# Altium PCB arduino_nano_v3.PcbDoc
Units mm, origin at the board's own origin, x right, y up, seen from the top; angles counter-clockwise.
Board outline 21.72 x 42.16 mm, 4 copper layers (Top Layer, GND, Layer 2, Bottom Layer), stack 0.603 mm thick; 32 components, 43 nets, 165 pads, 43 vias.
Unrouted connection lines stored in the file: 2.
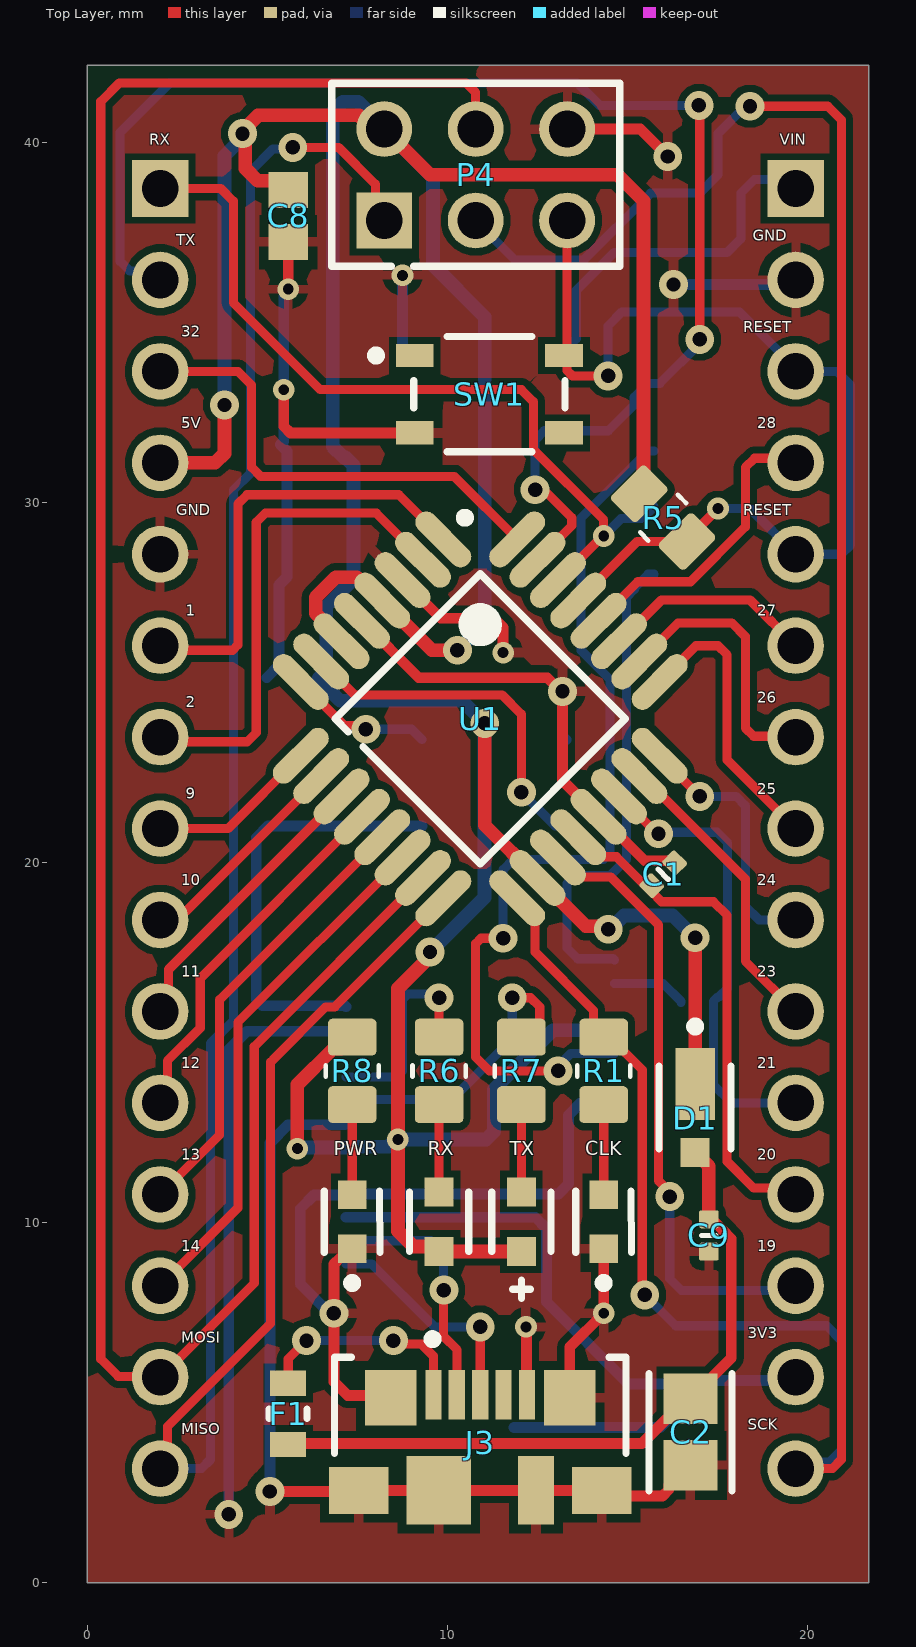
[diagram p0: Top Layer view]
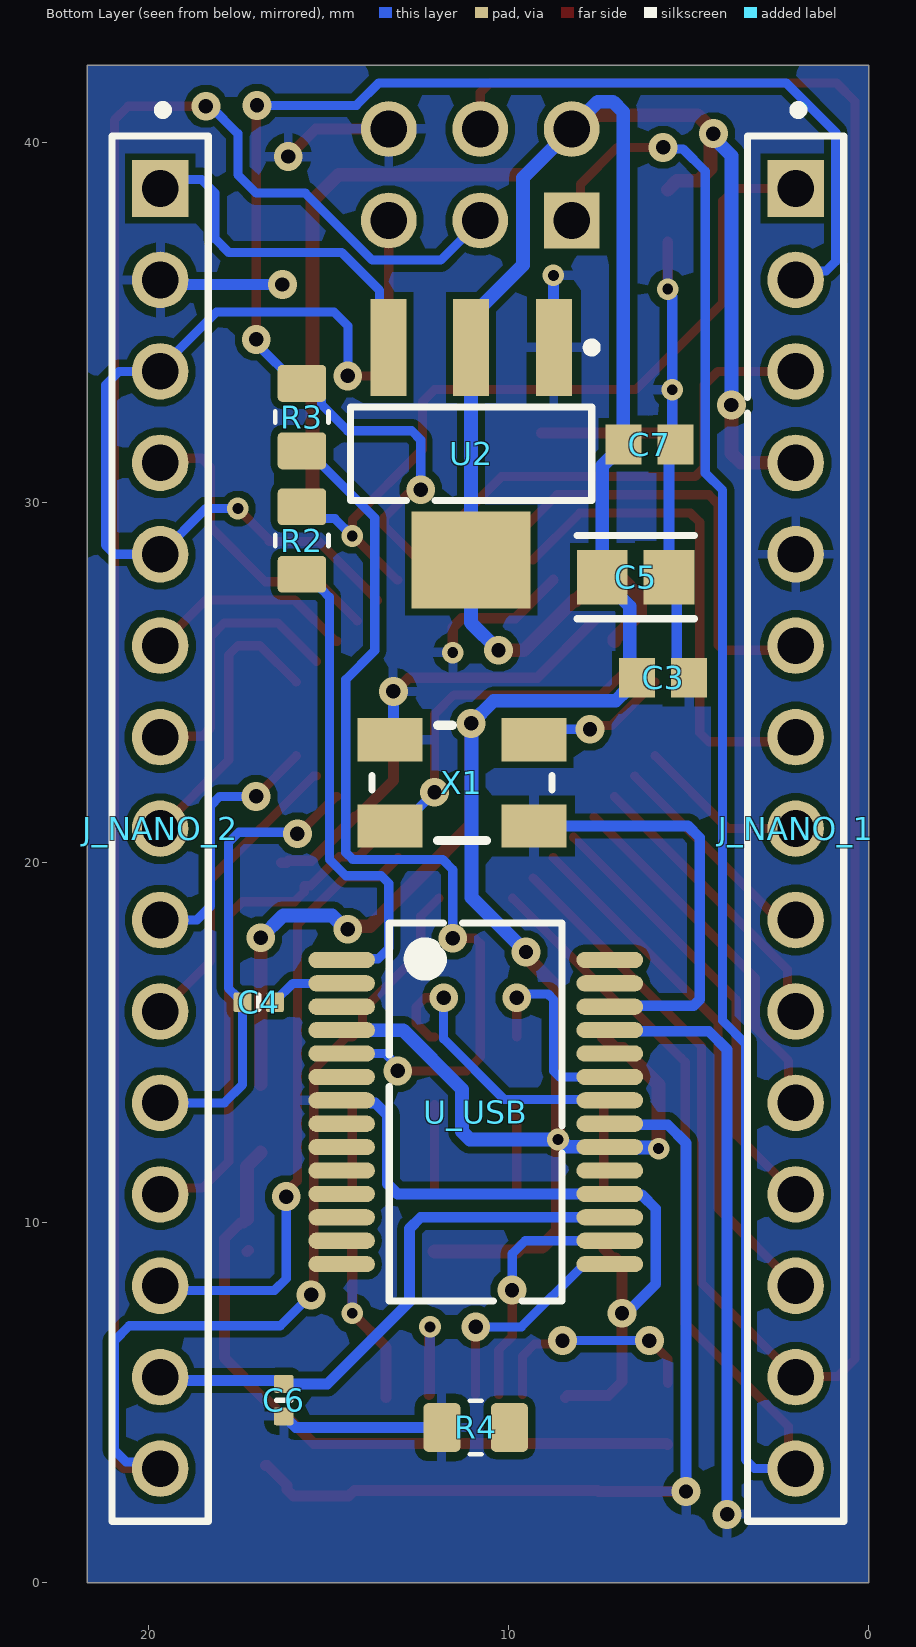
[diagram p1: Bottom Layer view, seen from below]
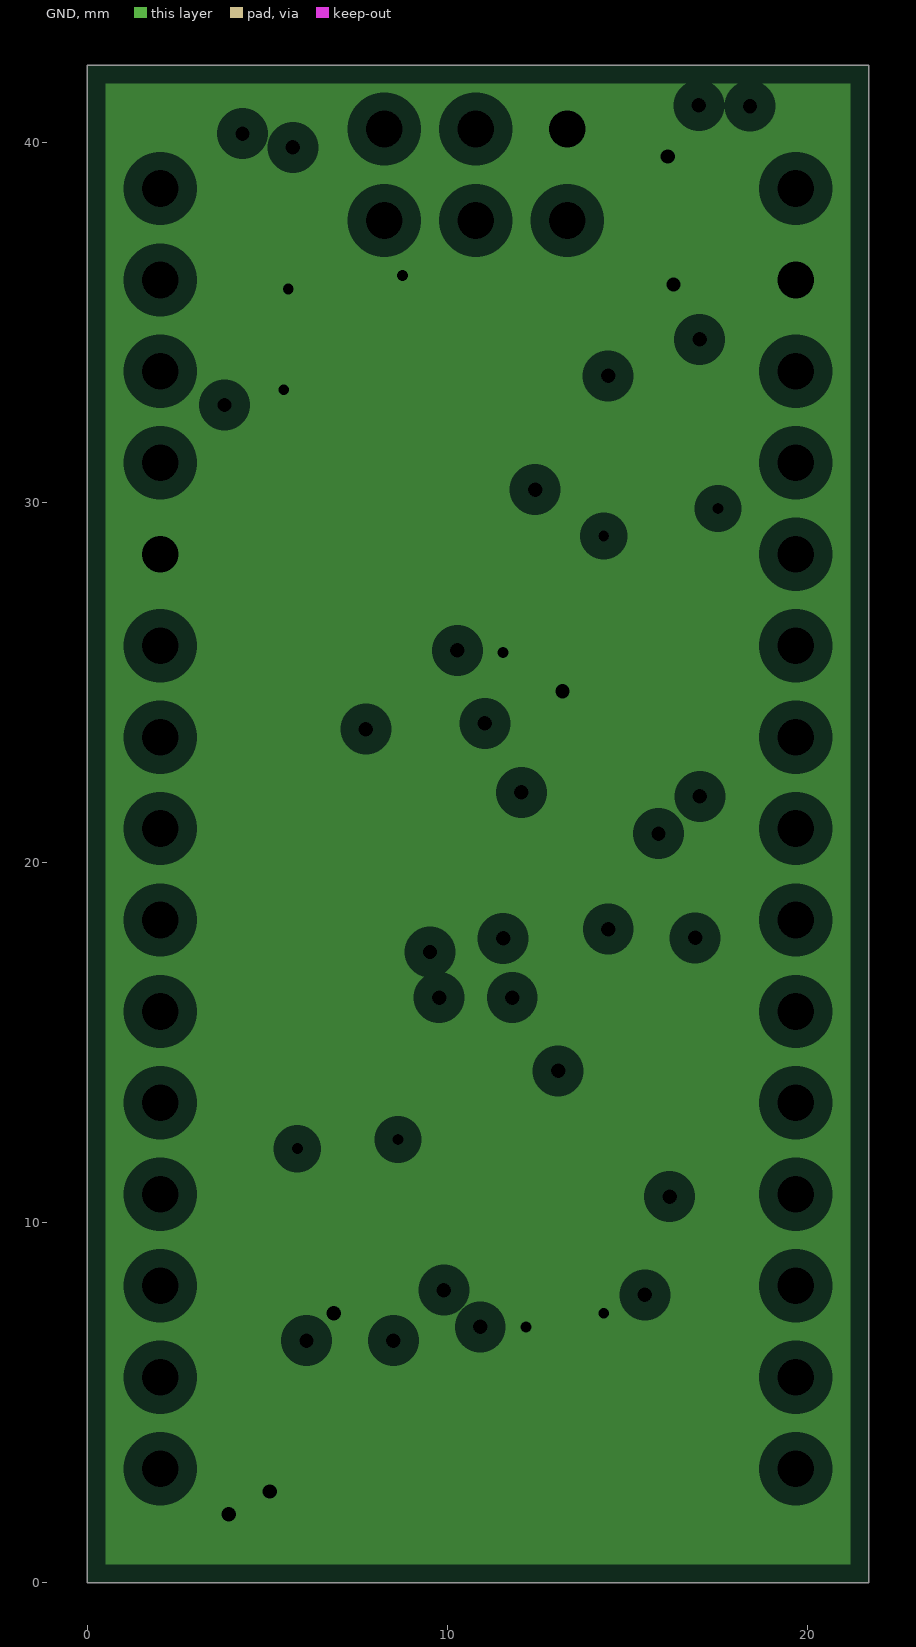
[diagram p2: GND, clearances drawn from the general rule]
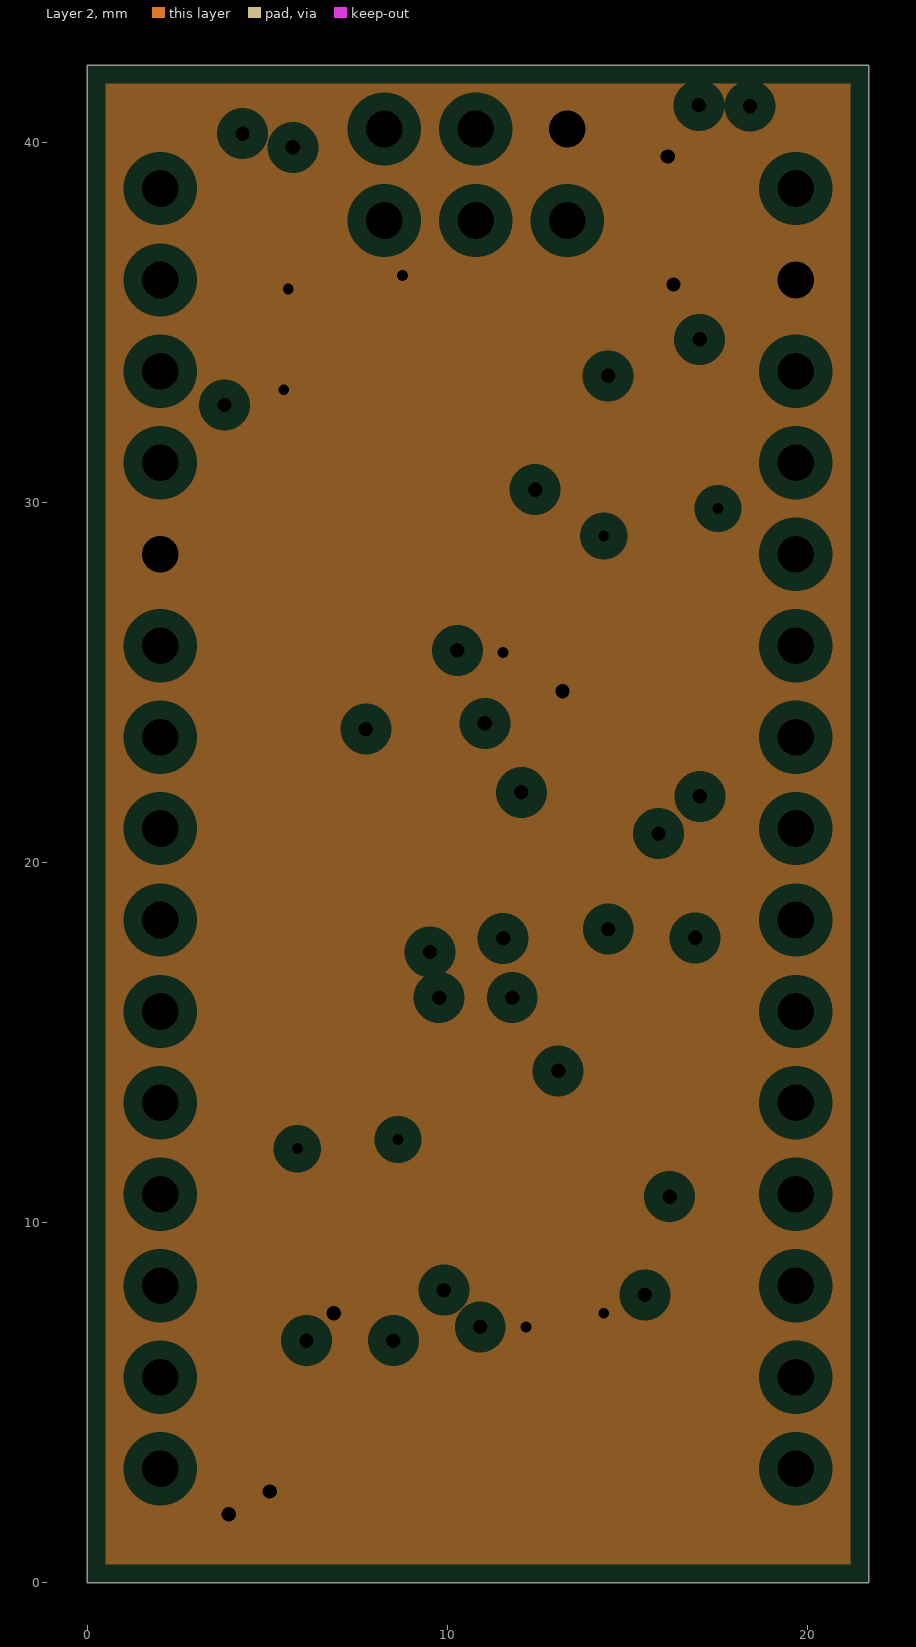
[diagram p3: Layer 2, clearances drawn from the general rule]
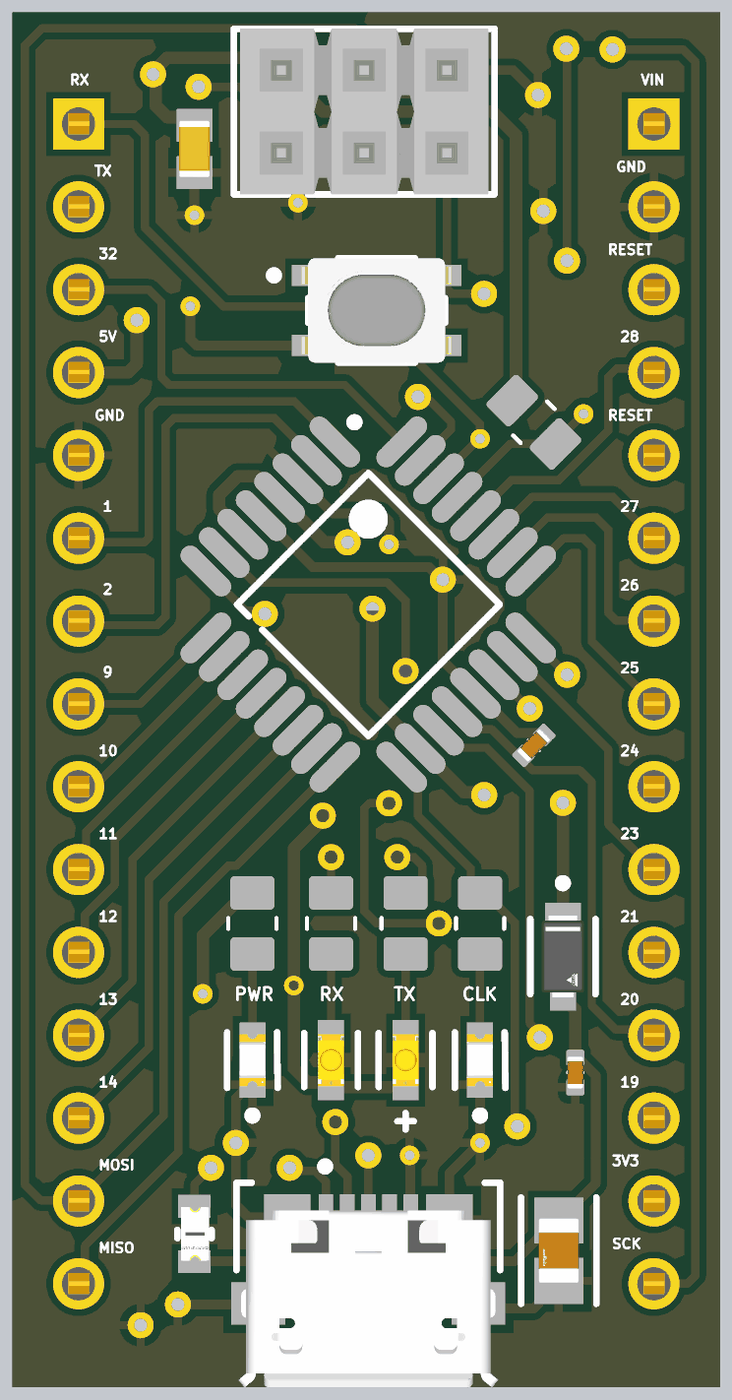
[diagram p4: 3D render of the assembled board from above, using the file's embedded part models]
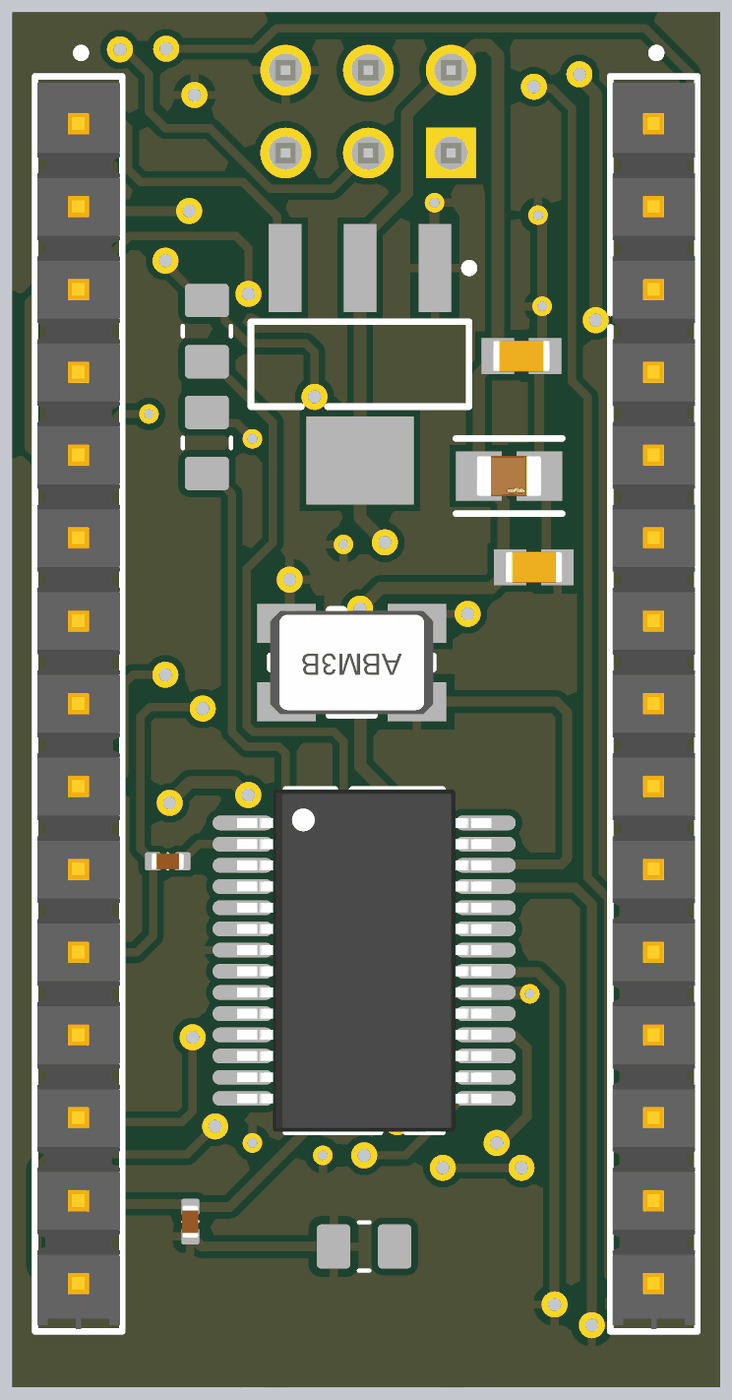
[diagram p5: 3D render of the assembled board from below, using the file's embedded part models]

## Layer stack, top to bottom
Top Solder: solder mask 0.0102, Solder Resist, Dk 3.5
Top Layer: signal copper 0.0356
Dielectric 2: prepreg 0.0711, PP-006, Dk 4.1
GND: plane copper 0.035, net GND
Dielectric 1: dielectric 0.32, FR-4, Dk 4.8
Layer 2: plane copper 0.035, net GND
Dielectric 3: prepreg 0.0711, PP-006, Dk 4.1
Bottom Layer: signal copper 0.0356
Bottom Solder: solder mask 0.0102, Solder Resist, Dk 3.5

## Board outline
0,0 0,42.164 21.717,42.164 21.717,0

## Design rules (kind name [scope] priority, off if disabled: settings)
AssemblyTestPointUsage [All] p1: isadvanced=TRUE
AssemblyTestpoint [All] p1: isadvanced=TRUE testpointundercomponent=TRUE minsize=1.016 maxsize=2.54 preferedsize=1.524 minholesize=0 maxholesize=1.016 preferedholesize=0.813 testpointgrid=0.025 usegrid=TRUE gridtolerance=0 allowsidetop=TRUE allowsidebottom=TRUE
Clearance Clearance_1 [OnMid vs OnMid] p1: gap=0.2 ignorepadtopadclearanceinfootprint=FALSE sourcerule=47 cellrowname=All cellrowtype=0 cellcolname=All cellcoltype=0 innerlayers=TRUE
Clearance Clearance_2 [(ExistsOnLayer('Top Layer') Or ExistsOnLayer('Bottom Layer')) vs (ExistsOnLayer('Top Layer') Or ExistsOnLayer('Bottom Layer'))] p2: gap=0.2 ignorepadtopadclearanceinfootprint=FALSE sourcerule=47 cellrowname=All cellrowtype=0 cellcolname=All cellcoltype=0 outerlayers=TRUE
Clearance [All] p3: gap=0.254 ignorepadtopadclearanceinfootprint=FALSE ismatrix=TRUE
ComponentClearance [All] p1: isadvanced=TRUE gap=0.254 collisioncheckmode=3 verticalgap=0.254 showdistances=FALSE
FabricationTestPointUsage [All] p1: isadvanced=TRUE valid=0 allowmultiple=FALSE
FabricationTestpoint [All] p1: isadvanced=TRUE side=3 testpointundercomponent=TRUE minsize=1.016 maxsize=2.54 preferedsize=1.524 minholesize=0 maxholesize=1.016 preferedholesize=0.813 testpointgrid=0.025 allowsidetop=TRUE allowsidebottom=TRUE usegrid=TRUE gridtolerance=0
FanoutControl Fanout_BGA [IsBGA] p1: isadvanced=TRUE bgadir=Out bgaviamode=Centered fanoutstyle=Auto fanoutdirection=Alternating viagrid=0.025 // Fanout_BGA (Default Rule)
FanoutControl Fanout_LCC [IsLCC] p2: isadvanced=TRUE bgadir=Out bgaviamode=Centered fanoutstyle=Auto fanoutdirection=Alternating viagrid=0.025 // Fanout_LCC (Default Rule)
FanoutControl Fanout_SOIC [IsSOIC] p3: isadvanced=TRUE bgadir=Out bgaviamode=Centered fanoutstyle=Auto fanoutdirection=Alternating viagrid=0.025 // Fanout_SOIC (Default Rule)
FanoutControl Fanout_Small [(CompPinCount < 5)] p4: isadvanced=TRUE bgadir=Out bgaviamode=Centered fanoutstyle=Auto fanoutdirection=OutThenIn viagrid=0.025 // Fanout_Small (Default Rule)
FanoutControl Fanout_Default [All] p5: isadvanced=TRUE bgadir=Out bgaviamode=Centered fanoutstyle=Auto fanoutdirection=Alternating viagrid=0.025 // Fanout_Default (Default Rule)
Height [All] p1: isadvanced=TRUE minheight=0 maxheight=25.4 prefheight=12.7
HoleSize [All] p1: isadvanced=TRUE absolutevalues=TRUE maxlimit=2.54 minlimit=0.025 maxpercent=80.000 minpercent=20.000
HoleToHoleClearance [All] p1: isadvanced=TRUE gap=0.254 allowstackedmicrovias=TRUE
LayerPairs [All] p1: isadvanced=TRUE enforce=TRUE
MinimumSolderMaskSliver [All] p1: isadvanced=TRUE minsoldermaskwidth=0.076
NetAntennae [All] p1: isadvanced=TRUE netantennaetolerance=0
PasteMaskExpansion [All] p1: isadvanced=TRUE expansion=0
PlaneClearance [All] p1: isadvanced=TRUE clearance=0.508
PlaneConnect [All] p1: isadvanced=TRUE planeconnectstyle=Relief reliefexpansion=0.508 reliefentries=4 reliefconductorwidth=0.254 reliefairgap=0.254
PolygonConnect [All] p1: connectstyle=Relief reliefconductorwidth=0.254 reliefentries=4 polygonreliefangle="90 Angle" airgapwidth=0.254
RoutingCorners [All] p1: isadvanced=TRUE cornerstyle=45-Degree minsetback=2.54 maxsetback=2.54
RoutingPriority [All] p1: isadvanced=TRUE routingpriority=0
RoutingVias [All] p1: holewidth=0.3 width=0.6 viastyle="Through Hole" minholewidth=0.2 minwidth=0.4 maxholewidth=0.4 maxwidth=0.8
ShortCircuit [All] p1: isadvanced=TRUE allowed=FALSE
SilkToSilkClearance [All] p1: isadvanced=TRUE silktosilkclearance=0.254
SilkToSolderMaskClearance [IsPad] p1: isadvanced=TRUE minsilkscreentomaskgap=0.076 clearancetoexposedcopper=TRUE
SolderMaskExpansion [All] p1: isadvanced=TRUE expansion=0 istentingtop=FALSE
SupplyNets "Schematic Supply Nets_4" [InNet('VUSB')] p1: isadvanced=TRUE voltage=0.000
SupplyNets "Schematic Supply Nets_3" [InNet('GND')] p2: isadvanced=TRUE voltage=0.000
SupplyNets "Schematic Supply Nets_2" [InNet('+5V')] p3: isadvanced=TRUE voltage=0.000
SupplyNets "Schematic Supply Nets_1" [InNet('3V3')] p4: isadvanced=TRUE voltage=0.000
SupplyNets "Schematic Supply Nets" [InNet('VIN')] p5: isadvanced=TRUE voltage=0.000
UnRoutedNet [All] p1: isadvanced=TRUE
UnpouredPolygon [All] p1: isadvanced=TRUE
Width MaxMinWidth_3 [InNet('GND')] p1: maxlimit=0.6 minlimit=0.3 preferedwidth=0.4 minimp=50.000000 maximp=50.000000 favimp=50.000000
Width MaxMinWidth_1 [InNet('+5V')] p2: maxlimit=0.6 minlimit=0.3 preferedwidth=0.4 minimp=50.000000 maximp=50.000000 favimp=50.000000
Width MaxMinWidth_2 [InNet('3V3')] p3: maxlimit=0.6 minlimit=0.3 preferedwidth=0.4 minimp=50.000000 maximp=50.000000 favimp=50.000000
Width MaxMinWidth_6 [InNet('VIN')] p4: maxlimit=0.4 minlimit=0.254 preferedwidth=0.3 minimp=50.000000 maximp=50.000000 favimp=50.000000
Width MaxMinWidth_7 [InNet('VUSB')] p5: maxlimit=0.6 minlimit=0.3 preferedwidth=0.4 minimp=50.000000 maximp=50.000000 favimp=50.000000
Width MaxMinWidth_4 [InNetClass('SIGNAL')] p6: maxlimit=0.5 minlimit=0.2 preferedwidth=0.254 minimp=50.000000 maximp=50.000000 favimp=50.000000
Width [All] p7: maxlimit=0.254 minlimit=0.254 preferedwidth=0.254
4 further rules are at their usual default settings.

## Classes and differential pairs
component class U_USB: C4 C6 F1 J3 R6 R7 RX TX U_USB
component class U_connector: J_NANO_1
component class U_arduino_nano: C1 C2 C3 C5 C7 C8 C9 CLK P4 PWR R1 R2 R3 R4 R5 R8 SW1 U2 X1

## Components (designator, comment, footprint, x,y, rotation, side; value= is the part's Value field where it differs from the comment)
C1 "Capacitor 100nF +/-20% 25V 0402" CAPC0402(1005)60_L 16.002,19.685 r225 top value=100nF
C2 "4.7 uF" FP-GRM21B-0_15-IPC_A 16.764,4.191 r270 top
C3 "Capacitor 1uF +/- 10% 16V 0603" CAPC1608X90X35ML15T15 5.715,25.146 r180 bottom value=1µF
C4 "Capacitor 100nF +/-20% 25V 0402" CAPC0402(1005)60_L 16.949,16.129 r0 bottom value=100nF
C5 "4.7 uF" FP-GRM21B-0_15-IPC_A 6.477,27.94 r180 bottom
C6 "Capacitor 100nF +/-20% 25V 0402" CAPC0402(1005)60_L 16.256,5.08 r270 bottom value=100nF
C7 "Capacitor 1uF +/- 10% 16V 0603" CAPC1608X90X35ML15T15 6.096,31.623 r180 bottom value=1µF
C8 "Capacitor 1uF +/- 10% 16V 0603" CAPC1608X90X35ML15T15 5.588,37.973 r90 top value=1µF
C9 "Capacitor 100nF +/-20% 25V 0402" CAPC0402(1005)60_L 17.272,9.652 r270 top value=100nF
CLK "" FP-5973901831F-MFG 14.351,10.033 r90 top
D1 "MSS1P3L-M3/89A" FP-96591-MFG 16.891,13.208 r270 top value=65pF
F1 "MF-FSMF050X-2" FP-MF-FSMF-MFG 5.588,4.699 r270 top value=0.1-0.8Ω
J3 "473460001" FP-473460001-MFG 10.922,2.921 r0 top
J_NANO_1 "TSW-115-07-G-S" FP-TSW-115-07-G-S-MFG 2.032,20.955 r90 bottom
J_NANO_2 "TSW-115-07-G-S" FP-TSW-115-07-G-S-MFG 19.685,20.955 r90 bottom
P4 "TSW-103-08-T-D" SMTC-TSW-103-08-X-D 8.255,37.846 r0 top
PWR "" FP-5973901831F-MFG 7.366,10.033 r90 top
R1 "ERJP06J102V_with_model" RESC2012X70N 14.351,14.224 r270 top value=1k
R2 "ERJP06J102V_with_model" RESC2012X70N 15.748,28.956 r270 bottom value=1k
R3 "ERJP06J102V_with_model" RESC2012X70N 15.748,32.385 r270 bottom value=1k
R4 "ERJP06J102V_with_model" RESC2012X70N 10.922,4.318 r180 bottom value=1k
R5 "ERJP06J102V_with_model" RESC2012X70N 16.002,29.591 r135 top value=1k
R6 "ERJP06J102V_with_model" RESC2012X70N 9.779,14.224 r90 top value=1k
R7 "ERJP06J102V_with_model" RESC2012X70N 12.065,14.224 r90 top value=1k
R8 "ERJP06J102V_with_model" RESC2012X70N 7.366,14.224 r270 top value=1k
RX "" FP-APTD1608SYC-J3-MFG 9.779,10.033 r270 top
SW1 "" FP-PTS810SJM250SMTRLFS-MFG 11.176,33.02 r0 top
TX "" FP-APTD1608SYC-J3-MFG 12.065,10.033 r270 top
U1 "ATmega328P-AU" 32A_M 10.922,24.003 r315 top
U2 "LM1117IMPX-5.0/NOPB" MP04A_M 11.049,31.369 r270 bottom
U_USB "FT232RL" FTDI-SSOP-28_M 10.922,13.081 r180 bottom
X1 "ABM3B-16.000MHZ-B2-T" ABRA-ABM3B-4_V 11.303,22.225 r0 bottom

## Footprints (in the part's own frame and the unit in brackets; to place one, negate y for a bottom-side part, rotate by r counter-clockwise, add the part's x,y. Pads: shape width x height; smd on the part's side, far side on the other; paste and mask are expansions set on the pad)
32A_M [mm] "Thin QFP, 32-Leads, Body 7x7mm, Pitch 0.8mm, IPC Low Density"
  oval 1.95x0.6 smd: 1(-4.25,2.8) 2(-4.25,2) 3(-4.25,1.2) 4(-4.25,0.4) 5(-4.25,-0.4) 6(-4.25,-1.2) 7(-4.25,-2) 8(-4.25,-2.8) 17(4.25,-2.8) 18(4.25,-2) 19(4.25,-1.2) 20(4.25,-0.4) 21(4.25,0.4) 22(4.25,1.2) 23(4.25,2) 24(4.25,2.8)
  oval 0.6x1.95 smd: 9(-2.8,-4.25) 10(-2,-4.25) 11(-1.2,-4.25) 12(-0.4,-4.25) 13(0.4,-4.25) 14(1.2,-4.25) 15(2,-4.25) 16(2.8,-4.25) 25(2.8,4.25) 26(2,4.25) 27(1.2,4.25) 28(0.4,4.25) 29(-0.4,4.25) 30(-1.2,4.25) 31(-2,4.25) 32(-2.8,4.25)
  silkscreen extent -4.37,-2.85 2.85,3.77, body extent -3.5,-3.5 3.5,3.5, height 1.2
ABRA-ABM3B-4_V [mm] "SMD, 4-Leads, Body 5x3.2mm"
  rect 1.8x1.2 smd: 1(-2,-1.2) 2(2,-1.2) 3(2,1.2) 4(-2,1.2)
  silkscreen extent -2.5,-1.6 2.5,1.6, body extent -2.5,-1.59 2.5,1.59, height 1.13
CAPC0402(1005)60_L [mm] "Chip Capacitor, Body 1.0x0.5mm, Height 0.6mm, IPC High Density"
  rrect25% 0.5x0.55 smd: 1(-0.45,0) 2(0.45,0)
  silkscreen extent 0,-0.2 0,0.2, body extent -0.5,-0.25 0.5,0.25, height 0.6
CAPC1608X90X35ML15T15 [mm] "Chip Capacitor, 2-Leads, Body 1.75x0.95mm, IPC Low Density"
  rect 1x1.1 smd: 1(-0.725,0) 2(0.725,0)
  body extent -0.87,-0.48 0.87,0.48, height 0.9
FP-96591-MFG [mm]
  rect 2x1.1 smd paste+0 mask+0: 1(-0.65,0)
  rect 0.8x0.8 smd paste+0 mask+0: 2(1.25,0)
  silkscreen extent -2.37,-1 1.15,1, body extent -1.75,-0.8 1.75,0.8, height 0.25
FP-473460001-MFG [mm]
  rect 0.45x1.38 smd paste+0 mask+0: 1(-1.3,2.31) 2(-0.65,2.31) 3(0,2.31) 4(0.65,2.31) 5(1.3,2.31)
  rect 1.425x1.55 smd paste+0 mask+0: 6(-2.488,2.225) 7(2.488,2.225)
  rect 1.65x1.3 smd paste+0 mask+0: 8(-3.375,-0.35) 11(3.375,-0.35)
  rect 1.8x1.9 smd paste+0 mask+0: 9(-1.15,-0.35)
  rect 1x1.9 smd paste+0 mask+0: 10(1.55,-0.35)
  silkscreen extent -4.05,0.67 4.05,3.97, body extent -4.3,-2.48 4.3,3.45, height 0.25
FP-5973901831F-MFG [mm]
  rect 0.8x0.8 smd paste+0 mask+0: 1(-0.75,0) 2(0.75,0)
  silkscreen extent -1.82,-0.77 0.85,0.77, body extent -1.25,-0.56 1.25,0.56, height 0.25
FP-APTD1608SYC-J3-MFG [mm]
  rect 0.8x0.8 smd paste+0 mask+0: 1(-0.825,0) 2(0.825,0)
  silkscreen extent -0.82,-0.82 0.82,0.82, body extent -1.33,-0.58 1.33,0.58, height 0.25
FP-GRM21B-0_15-IPC_A [mm]
  rect 1.406x1.508 smd paste+0 mask+0: 1(-0.926,0) 2(0.926,0)
  silkscreen extent -1.63,-1.15 1.63,1.15, body extent -1,-0.63 1,0.63, height 1.4
FP-MF-FSMF-MFG [mm]
  rect 0.7x1 smd paste+0 mask+0: 1(-0.85,0) 2(0.85,0)
  silkscreen extent -0.13,-0.53 0.13,0.53, body extent -0.83,-0.41 0.82,0.44, height 1
FP-PTS810SJM250SMTRLFS-MFG [mm]
  rect 1.05x0.65 smd paste+0 mask+0: 1(-2.075,1.075) 2(2.075,1.075) 3(-2.075,-1.075) 4(2.075,-1.075)
  silkscreen extent -3.27,-1.6 2.1,1.6, body extent -2.7,-1.7 2.7,1.7, height 0.25
FP-TSW-115-07-G-S-MFG [mm]
  rect 1.57x1.57 hole 1.02 paste-2539.97 mask+0: 1(17.78,0)
  round 1.57 hole 1.02 paste-2539.97 mask+0: 2(15.24,0) 3(12.7,0) 4(10.16,0) 5(7.62,0) 6(5.08,0) 7(2.54,0) 8(0,0) 9(-2.54,0) 10(-5.08,0) 11(-7.62,0) 12(-10.16,0) 13(-12.7,0) 14(-15.24,0) 15(-17.78,0)
  silkscreen extent -19.24,-1.34 20.08,1.34, body extent -19.18,-1.27 19.05,1.27, height 8.63
FTDI-SSOP-28_M [mm] "SOP, 28-Leads, Body 10.5x5.6mm, Pitch 0.65mm, IPC Low Density"
  oval 1.85x0.45 smd: 1(-3.725,4.225) 2(-3.725,3.575) 3(-3.725,2.925) 4(-3.725,2.275) 5(-3.725,1.625) 6(-3.725,0.975) 7(-3.725,0.325) 8(-3.725,-0.325) 9(-3.725,-0.975) 10(-3.725,-1.625) 11(-3.725,-2.275) 12(-3.725,-2.925) 13(-3.725,-3.575) 14(-3.725,-4.225) 15(3.725,-4.225) 16(3.725,-3.575) 17(3.725,-2.925) 18(3.725,-2.275) 19(3.725,-1.625) 20(3.725,-0.975) 21(3.725,-0.325) 22(3.725,0.325) 23(3.725,0.975) 24(3.725,1.625) 25(3.725,2.275) 26(3.725,2.925) 27(3.725,3.575) 28(3.725,4.225)
  silkscreen extent -2.4,-5.25 2.4,5.25, body extent -3.9,-5.25 3.9,5.25, height 2
MP04A_M [mm] "SOT223, 4-Leads, Body 6.5x3.5mm, Pitch 2.3mm, Lead Span 7mm, IPC Low Density"
  rect 2.7x1 smd: 1(-2.95,2.3) 2(-2.95,0) 3(-2.95,-2.3)
  rect 2.7x3.3 smd: 4(2.95,0)
  silkscreen extent -3.07,-3.35 1.3,3.47, body extent -1.86,-3.35 1.86,3.35, height 1.8
RESC2012X70N [mm] "Chip Resistor, 2-Leads, Body 2,00x1,25mm, IPC Medium Density"
  rrect25% 1.025x1.35 smd: 1(-0.937,0) 2(0.938,0)
  silkscreen extent -0.16,-0.74 0.16,0.74, body extent -1,-0.63 1,0.63, height 0.7
SMTC-TSW-103-08-X-D [mm] ".025 SQ Post Terminal Strip Assembly, 2x3 Pins, Vertical, 2.54mm Pitch, Male"
  rect 1.55x1.55 hole 1.02: 1(0,0)
  round 1.55 hole 1.02: 2(0,2.54) 3(2.54,0) 4(2.54,2.54) 5(5.08,0) 6(5.08,2.54)
  silkscreen extent -1.46,-1.27 6.54,3.81, body extent -1.27,-1.27 6.35,3.81, height 8.38

## Part data
C1 C4 C6 C9: library part CMP-001-00065-4, "Chip Capacitor, 100nF +/-20%, 25V, 0402, Thickness 0.6 mm", Case/Package=0402, Max Operating Temperature=85°C, Min Operating Temperature=-55°C, Tolerance=10%, Voltage Rating=25V, Mounting Technology=SMT, Pins=2
C2 C5: library part CMP-06035-033280-1, "Chip Multilayer Ceramic Capacitors for General Purpose, 0805, 4.7uF, X6S, 22%, 20%, 35V", Capacitance=4.7uF, Case/Package=0805, Dielectric=X6S, Tolerance=20%, Voltage Rating (DC)=35V, Length=2mm, Thickness=1.25mm, Width=1.25mm
C3 C7 C8: library part CMP-001-00004-6, "Chip Capacitor, 1 uF, +/- 10%, 16 V, 0603 (1608 Metric)", Capacitor Type=Ceramic, Case/Package=0603, Max Operating Temperature=125°C, Min Operating Temperature=-55°C, Tolerance=10%, Voltage Rating=16V, Mounting Technology=SM, Pins=2, RoHS Compliant=True
CLK PWR: library part CMP-15384-000002-3, "LED COOL WHITE 2SMD", Case Code (Imperial)=0603, Case Code (Metric)=1608, Color=White, Forward Current=10mA, Forward Voltage=3.4V, Lens Color=Yellow, Max Operating Temperature=80°C, Min Operating Temperature=-20°C, Power Dissipation=70mW, Reverse Voltage=5V, Case/Package=0603, Height=550µm, Illumination Color=White, Length=1.6mm, Lens Style="Diffused, Rectangular, Tinted", Luminous Intensity=240mcd, Mount="Surface Mount", NexarPartId=10598902, Packaging="Cut Tape", Power Rating=70mW, REACH SVHC="No SVHC", RoHS=Compliant, Test Current=10mA, Viewing Angle=130°, Width=800µm
D1: library part CMP-02539-000006-1, "DIODE SCHOTTKY 30V 1A MICROSMP", Capacitance=65pF, Forward Current=1A, Manufacturer=Vishay, Max Junction Temp=+150°C, Max Repetitive Reverse Voltage=30V, Max Surge Forward Current=25A, Package=96591, Peak Reverse Current=15uA, Temperature="-55°C to +150°C", Temperature Range Low=-55°C, Automotive=No, Category=Diode, ComponentLink2Description=Datasheet, ComponentLink2URL=http://www.vishay.com/docs/89020/mss1p3l.pdf, Device Class L1="Discrete Semiconductors", Device Class L2=Diodes, Device Class L3="Schottky Diodes", Digikey Description="DIODE SCHOTTKY 30V 1A MICROSMP", Footprint Url=http://www.vishay.com/docs/96591/microsmp_do-219ad_fredpt.pdf, Height=0.73mm, Lead Free=Yes, Manufacturer Part Number=MSS1P3L-M3/89A, Mouser Description="Schottky Diodes & Rectifiers 1.0 Amp 30 Volt", Octopart=https://octopart.com/mss1p3l-m3%2F89a-vishay-42670898, RoHS=TRUE, Temperature Range High=+150°C
F1: library part CMP-07400-000010-1, "PTC RESET FUSE 6V 500MA 0603", Ambient Temperature Range High=+85°C, Ambient Temperature Range Low=-40°C, Current Rating=40A, Hold Current=0.5A, Manufacturer="Bourns Inc.", Package=MF-FSMF, Resistance=0.1-0.8Ω, Temperature="-40°C to +85°C", Trip Current=1A, Voltage Rating=6V, Automotive=No, Category=Fuse, ComponentLink2Description=Datasheet, ComponentLink2URL=https://www.bourns.com/docs/Product-Datasheets/mffsmf.pdf, Device Class L1="Circuit Protection", Device Class L2="PTC Resettable Fuses", Device Class L3=unset, Digikey Description="PTC RESET FUSE 6V 500MA 0603", Height=1mm, Lead Free=Yes, Manufacturer Part Number=MF-FSMF050X-2, Mouser Description="Resettable Fuses - PPTC 6volts 40amps", Octopart=https://octopart.com/mf-fsmf050x-2-bourns-10470804, RoHS=TRUE, Temperature Range High=+85°C, Temperature Range Low=-40°C, Trip Time=0.1s
J3: library part CMP-2000-05246-2, "CONN RCPT USB2.0 MICRO B SMD R/A", Current Rating=1.8A, Manufacturer=Molex, Package=0, Temperature="-30°C to +85°C", Temperature Range High=+85°C, Temperature Range Low=-30°C, Voltage Rating=30V, Automotive=No, Category=Conn, ComponentLink2Description=Datasheet, ComponentLink2URL=https://www.molex.com/webdocs/datasheets/pdf/en-us/0473460001_IO_CONNECTORS.pdf, Conn Orientation="Right Angle", Contact Material=Gold,Nickel, Device Class L1=Connectors, Device Class L2="USB Connectors", Device Class L3=unset, Digikey Description="CONN RCPT USB2.0 MICRO B SMD R/A", Footprint Url=https://www.molex.com/pdm_docs/sd/473460001_sd.pdf, Height=2.945mm, Is Female=yes, Lead Free=Yes, Manufacturer Part Number=473460001, Number of Contacts=5, Octopart=https://octopart.com/47346-0001-molex-7164928, Pitch=0.65mm, RoHS=TRUE, Shielding=true, Usb Standard="USB 2.0"
J_NANO_1 J_NANO_2: library part CMP-02766-000090-1, "CONN HEADER VERT 15POS 2.54MM", Manufacturer=SAMTEC, Temperature="-55°C to +125°C", Temperature Range High=+125°C, Temperature Range Low=-55°C, Automotive=No, Category=Conn, ComponentLink2Description=Datasheet, ComponentLink2URL=http://suddendocs.samtec.com/catalog_english/tsw_th.pdf, Conn Gender=Male, Conn Orientation=Vertical, Contact Material=Gold,Nickel, Device Class L1=Connectors, Device Class L2="Headers and Wire Housings", Device Class L3=unset, Digikey Description="CONN HEADER VERT 15POS 2.54MM", Footprint Url=http://suddendocs.samtec.com/prints/tsw-xxx-xx-x-x-xx-xxx-footprint.pdf, Height=8.71mm, Lead Free=Yes, Manufacturer Part Number=TSW-115-07-G-S, Number of Contacts=15, Number of Rows=1, Octopart=https://octopart.com/tsw-115-07-g-s-samtec-272210, Package=TSW-115-07-G-S, Pitch=2.54mm, RoHS=TRUE
P4: library part CMP-1024-00335-1, "0.025\" SQ Post Header, Through-hole, Vertical, -55 to 105 degC, 2.54 mm Pitch, 6-Pin, Male, RoHS", Manufacturer=Samtec, Temperature Range="-55 to 105 degC", ComponentLink1Description="Manufacturer URL", ComponentLink1URL=http://www.samtec.com, ComponentLink2Description=Datasheet, ComponentLink2URL=http://www.samtec.com/documents/webfiles/pdf/TSW_TH.PDF, ComponentLink3Description="Package Specification", ComponentLink3URL=http://www.samtec.com/documents/webfiles/cpdf/TSW-XXX-XX-XXX-X-XX-XXX-MKT.pdf, DatasheetVersion=F-214, Mounting Technology=Through-hole, Orientation=Vertical, PackageDescription=".025[0.64] SQ. Post Terminal Strip Assembly", PackageReference=TSW-103-08-X-D, PackageVersion="DM, 8/1988", PartNumber=TSW-103-08-T-D, Pitch="2.54 mm", RoHS=True
R1 R2 R3 R4 R5 R6 R7 R8: library part CMP-009-00186-3, "Res Thick Film 0805 1K Ohm 5% 0.5W(1/2W) ±200ppm/C Pad SMD Automotive T/R", Case/Package=0805, Max Operating Temperature=155°C, Min Operating Temperature=-55°C, Tolerance=5%, Voltage Rating=400V, Mounting Technology="Surface Mount"
RX TX: library part CMP-44529-000016-1, "LED YELLOW CLEAR CHIP SMD", Case Code (Imperial)=0603, Case Code (Metric)=1608, Color=Yellow, Forward Current=20mA, Forward Voltage=2V, Lens Color=Colorless, Max Operating Temperature=85°C, Min Operating Temperature=-40°C, Package Quantity=2000, Case/Package=0603, Dominant Wavelength=590nm, Height=0.95mm, Illumination Color=Yellow, Lead Free="Lead Free", Length=1.6mm, Lens Style=Clear, Lens Transparency=Clear, Luminous Intensity=900mcd, Mount="Surface Mount", Packaging="Tape and Reel", Test Current=20mA, Viewing Angle=60°, Width=0.8mm
SW1: library part CMP-10040-000001-2, "SWITCH TACTILE SPST-NO 0.05A 16V", Case/Package=SMD/SMT, Color=Black, Current Rating=50mA, Max Operating Temperature=85°C, Min Operating Temperature=-40°C, Operating Force=160gf, Package Quantity=2900, Voltage Rating (DC)=16V, Actuator Type=Standard, Contact Plating=Silver, Depth=4.6mm, Illumination Type=Non-Illuminated, Lead Free="Lead Free", Length=3.2mm, Max Current Rating=50mA, Mechanical Life=150000Cycles, Mount="Surface Mount", Orientation=Straight, Packaging="Tape and Reel", RoHS Compliant=Yes, Switch Function=Off-Mom, Switch Travel=0.15mm, Termination=J-Bend, Throw Configuration=SPST
U1: library part CMP-0095-00269-2, "8-bit AVR Microcontroller, 32KB Flash, 1KB EEPROM, 2KB SRAM, 32-pin TQFP, Industrial Grade (-40°C to 85°C)", Code_JEDEC=MS-026-ABA, ComponentLink1Description="Manufacturer URL", ComponentLink1URL=http://www.atmel.com/, ComponentLink2Description="ATmega48A/48PA/88A/88PA/168A/168PA/328/328P Datasheet", ComponentLink2URL=http://www.atmel.com/dyn/resources/prod_documents/doc8271.pdf, ComponentLink3Description="ATmega48A/48PA/88A/88PA/168A/168PA/328/328P Summary", ComponentLink3URL=http://www.atmel.com/dyn/resources/prod_documents/8271S.pdf, DatasheetVersion="revD, May-2011", PackageDescription="32-Lead, 7x7x1.0 mm Body, 0.8mm Lead Pitch, Thin Profile Plastic Quad Flat Package (TQFP)", PackageReference=32A, PackageVersion="revC, Oct-2010", RevisionNote="DatasheetVersion & PackageVersion updated. URLs added."
U2: library part CMP-0062-01628-3, "800mA Low-Dropout Linear Regulator, 4-pin SOT-223, Pb-Free", Manufacturer="National Semiconductor", PackageTopMarking=XYTT*N06B, PowerWise=N, Code_IPC=SOT223-4, Code_JEDEC=TO-261-AA, ComponentLink1Description="Manufacturer URL", ComponentLink1URL=http://www.national.com/, ComponentLink2Description="LM1117 Datasheet", ComponentLink2URL=http://www.national.com/ds/LM/LM1117.pdf, ComponentLink3Description="LM1117 Web Page", ComponentLink3URL=http://www.national.com/pf/LM/LM1117.html, ComponentLink4Description="MP04A Package Page", ComponentLink4URL=http://www.national.com/packaging/folders/mp04a.html, CompType="LDO IC", DatasheetVersion=Apr-2006, High-Reliability=Y, PackageDescription="Molded SOT-223, 6.50 x 3.56 x 1.6mm Body, 4 Lead, 2.3mm Pitch", PackageReference=MP04A, PackageVersion="revB, Apr-2003", PartNumber=LM1117IMPX-5.0/NOPB, PinCount=4, RevisionNote="SCH symbol layout adjusted", RoHS=Y
U_USB: library part CMP-2000-05029-1, "IC USB FS SERIAL UART 28-SSOP", Manufacturer=FTDI, Maximum Operating Temperature=+85degC, Minimum Operating Temperature=-40degC, Package Type=SSOP, Datasheet URL=http://datasheet.octopart.com/FT232RL-FTDI-datasheet-120501.pdf, Datasheet Version="Rev. 1.04, 02/2006", Dimensions=10.2x5.3x1.75mm, Height=1.75mm, Length=10.2mm, Manufacturer URL=http://www.ftdichip.com/, Maximum Data Rate=3MBd, Mounting Type=SurfaceMount, Number of Channels per Chip=1, Pin Count=28, Receive FIFO=256B, Transmit FIFO=128B, Width=5.3mm
X1: library part CMP-003-00017-2, "Ceramic SMD Crystal, 16 MHz, +/- 20 ppm, 18 pF, -20 to 70 degC, 4-Pin SMD, RoHS, Tape and Reel", Case/Package=CSMD, Frequency=16MHz, Frequency Tolerance=20ppm, Load Capacitance=18pF, Manufacturer=Abracon, Max Operating Temperature=70°C, Min Operating Temperature=-20°C, Package Description="4-Pin Surface Mount Device, Body 5 x 3.2 mm", Package Quantity=1000, Package Reference=ABM3B, Resistance=50Ohm, Datasheet URL=http://www.abracon.com/Resonators/abm3b.pdf, Datasheet Version=Aug-15, ESR=50, Manufacturer URL=http://www.abracon.com/, Mounting Technology=SM, Packaging=TapeandReel, Pins=4, RoHS Compliant=True, Tolerance=20ppm

## Via types
v1: diameter 0.8, hole 0.4, Top Layer to Bottom Layer, 33 vias
v2: diameter 0.6, hole 0.3, Top Layer to Bottom Layer, 10 vias

## Nets (pads, with @x,y where several pads share a name; then routed paths per layer and width w, separated by ;. In a path a pad name is that pad's centre, name@x,y a point inside that pad or via, vN(x,y) a via of type N, cw(c..) or ccw(c..) an arc to the next point about the centre after c; other vN are vias at no path point)
3V3: C6.1 J_NANO_2.14 U_USB.17 | length 15.6
  Bottom Layer w0.3: U_USB.17 12.45,10.156 12.761,9.845 12.761,7.813 15.044,5.53 C6.1@16.231,5.53 ; C6.1 16.349,5.623 19.593,5.623 J_NANO_2.14
+5V: C3.1 C5.1 C7.1 C8.2 D1.1 J_NANO_1.4 P4.2 R5.2 R8.1 RX.2 TX.2 U1.4 U1.6 U1.18 U2.2 U2.4 U_USB.4 U_USB.20 | length 127.6
  Top Layer w0.381: J_NANO_1.4 3.556,31.115 3.817,31.376 v1(3.817,32.721) ; C8.2 5.339,38.947 4.741,38.947 4.398,39.29 4.398,40.179 v1(4.318,40.259) 4.318,40.334 4.751,40.767 7.558,40.767 7.939,40.386 P4.2 9.525,39.116 14.732,39.116 15.454,38.394 15.454,30.369 R5.2 ; v2(5.842,12.065) 5.842,13.843 6.838,14.839 7.044,14.839 R8.1 ; U1.6 7.068,26.219 6.35,26.937 6.35,27.373 6.917,27.94 7.491,27.94 8.14,27.291 U1.4 9.583,25.908 v1(10.287,25.908) ; v1(9.525,17.526) 9.525,17.399 8.636,16.51 v2(8.636,12.319) 8.636,9.779 9.07,9.345 9.642,9.345 RX.2 TX.2 ; v1(11.049,23.876) 11.049,21.048 U1.18 13.855,18.241 14.398,18.241 v1(14.478,18.161) ; D1.1 v1(16.891,17.921)
  Bottom Layer w0.381: v1(3.817,32.721) 3.817,39.645 4.318,40.146 v1(4.318,40.259) ; v2(5.842,12.065) 5.87,12.093 U_USB.20@7.184,12.093 ; C3.1 6.44,25.096 6.75,24.786 7.031,24.505 10.42,24.505 v1(11.049,23.876) 11.04,23.867 11.04,19.041 v1(9.525,17.526) ; C3.1@6.644,25.146 6.644,27.13 7.403,27.889 C5.1 7.403,31.04 7.18,31.263 7.131,31.263 6.821,31.573 6.821,40.857 7.112,41.148 7.524,41.148 8.255,40.417 P4.2 9.609,39.032 9.609,36.609 11.049,35.169 U2.2 U2.4 11.049,26.67 v1(10.287,25.908) ; U_USB.20@7.21,12.119 8.377,12.119 8.577,12.319 v2(8.636,12.319) 11.08,12.319 11.303,12.542 11.303,13.716 12.943,15.356 U_USB.4 U_USB.4@14.66,15.369 ; v1(14.478,18.161) 14.53,18.161 14.911,18.542 16.27,18.542 v1(16.891,17.921)
D+: J3.3 U_USB.15 | length 6.3
  Top Layer w0.254: J3.3 v1(10.922,7.112)
  Bottom Layer w0.254: U_USB.15 7.908,8.856 9.652,7.112 v1(10.922,7.112)
D-: J3.2 U_USB.16 | length 6.9
  Top Layer w0.254: v1(9.912,8.134) 9.906,8.128 9.906,6.846 10.279,6.472 10.279,5.239 J3.2
  Bottom Layer w0.254: U_USB.16 9.544,9.506 9.906,9.144 9.906,8.14 v1(9.912,8.134)
GND: C1.1 C2.2 C3.2 C5.2 C6.2 C7.2 C8.1 C9.2 CLK.1 J3.5 J3.6 J3.7 J3.8 J3.9 J3.10 J3.11 J_NANO_1.5 J_NANO_2.2 P4.6 PWR.1 R4.1 SW1.3 U1.3 U1.5 U1.21 U2.1 U_USB.7 U_USB.18 U_USB.21 U_USB.25 U_USB.26 X1.2 X1.4 | length 127.9
  Top Layer w0.3: v1(5.08,2.54) 7.516,2.54 J3.8 J3.9 J3.10 J3.11 14.455,2.413 15.984,2.413 16.16,2.589 16.16,2.712 16.713,3.265 C2.2 ; v2(5.461,33.147) 5.461,32.132 5.648,31.945 SW1.3 ; v2(5.588,35.941) C8.1 ; PWR.1 7.116,9.033 7.034,9.033 6.858,8.857 6.858,5.588 7.239,5.207 8.373,5.207 J3.6 ; U1.5 9.213,25.146 12.782,25.146 13.163,24.765 v1(13.208,24.765) 13.208,22.294 14.21,21.292 U1.21 14.271,21.281 15.489,20.062 16.12,20.062 16.179,20.003 C1.1 ; U1.3 9.825,26.797 11.303,26.797 11.557,26.543 v2(11.557,25.845) ; v2(12.192,7.112) 12.207,7.097 12.207,5.246 J3.5 ; P4.6 15.367,40.386 v1(16.129,39.624) ; J3.7 13.41,6.552 v2(14.351,7.493) CLK.1 ; C9.2@17.231,9.243 C9.2
  Bottom Layer w0.3: J_NANO_1.5 J_NANO_1.5@2.208,28.575 ; v1(3.937,1.905) 3.937,14.819 4.445,15.327 7.168,15.327 U_USB.25 ; C3.2 5.334,25.49 5.334,27.723 C5.2 5.551,31.443 C7.2 5.461,31.713 5.461,35.733 5.588,35.86 v2(5.588,35.941) ; v1(5.08,2.54) 5.08,12.222 5.585,12.727 7.168,12.727 U_USB.21 ; v1(6.858,7.493) 6.731,7.493 5.922,8.302 5.922,10.394 6.305,10.777 7.168,10.777 U_USB.18 13.092,10.806 13.372,11.086 13.372,12.994 13.709,13.331 13.766,13.331 13.831,13.331 13.906,13.406 U_USB.7 ; U_USB.26 7.168,16.035 4.875,16.035 4.699,16.21 4.699,20.701 5.023,21.025 X1.4 ; U2.1 8.763,34.333 v2(8.763,36.322) ; R4.1 15.919,4.318 16.231,4.63 C6.2 ; v1(13.208,24.765) 13.208,23.52 X1.2 ; v1(16.291,36.068) 19.558,36.068 J_NANO_2.2
MISO: J_NANO_1.15 P4.1 U1.16 | length 62.3
  Top Layer w0.254: J_NANO_1.15 2.231,3.374 2.231,4.341 5.099,7.209 5.099,14.467 5.207,14.575 5.207,14.577 6.631,16.001 6.88,16.001 U1.16 ; v1(5.715,39.878) 6.985,39.878 8.01,38.853 8.01,38.091 P4.1
  Bottom Layer w0.254: J_NANO_1.15 3.175,3.175 3.429,3.429 3.429,14.986 4.064,15.621 4.064,30.353 4.544,30.833 4.544,39.215 5.163,39.834 5.671,39.834 v1(5.715,39.878)
MOSI: J_NANO_1.14 P4.4 U1.15 | length 65.4
  Top Layer w0.254: U1.15 4.645,14.898 4.645,8.328 J_NANO_1.14 2.009,5.738 0.866,5.738 0.381,6.223 0.381,41.148 0.898,41.665 10.532,41.665 10.795,41.402 P4.4
NetC1_2: C1.2 J_NANO_2.12 U1.20 | length 14.3
  Top Layer w0.254: U1.20 14.188,20.171 14.705,20.171 15.51,19.367 C1.2 15.684,19.197 15.957,18.923 17.399,18.923 17.78,18.542 17.78,11.706 18.519,10.967 19.513,10.967 J_NANO_2.12
NetC4_1: C4.1 U_USB.2 | length 2.1
  Bottom Layer w0.254: U_USB.2 15.997,16.656 16.499,16.154 C4.1
NetC4_2: C4.2 J_NANO_2.11 U1.22 | length 13
  Top Layer w0.254: U1.22 14.808,21.846 15.842,20.812 v1(15.875,20.812)
  Bottom Layer w0.254: v1(15.875,20.812) 15.916,20.853 17.501,20.853 17.792,20.562 17.792,16.522 17.547,16.277 17.522,16.277 17.399,16.154 17.399,13.843 17.907,13.335 J_NANO_2.11
NetCLK_2: CLK.2 R1.2 | length 2.5
  Top Layer w0.254: CLK.2 R1.2
NetF1_1: F1.1 J3.1 | length 6.2
  Top Layer w0.254: F1.1 5.588,6.223 v1(6.096,6.731) ; v1(8.509,6.731) 8.606,6.634 9.29,6.634 9.622,6.302 J3.1
  Bottom Layer w0.254: v1(6.096,6.731) v1(8.509,6.731)
NetJ_NANO_1_3: J_NANO_1.3 U1.32 | length 13.2
  Top Layer w0.254: J_NANO_1.3 4.191,33.655 4.572,33.274 4.572,30.988 4.826,30.734 10.201,30.734 U1.32
NetJ_NANO_1_6: J_NANO_1.6 U1.1 | length 12.5
  Top Layer w0.254: J_NANO_1.6 2.159,25.908 4.042,25.908 4.191,26.057 4.191,29.972 4.445,30.226 8.659,30.226 U1.1
NetJ_NANO_1_7: J_NANO_1.7 U1.2 | length 13.9
  Top Layer w0.254: J_NANO_1.7 2.159,23.368 4.445,23.368 4.699,23.622 4.699,29.464 4.953,29.718 8.035,29.718 U1.2
NetJ_NANO_1_8: J_NANO_1.8 U1.9 | length 4.7
  Top Layer w0.254: J_NANO_1.8 3.914,20.955 U1.9
NetJ_NANO_1_9: J_NANO_1.9 U1.10 | length 6.1
  Top Layer w0.254: J_NANO_1.9 2.284,18.667 2.757,18.667 U1.10
NetJ_NANO_1_10: J_NANO_1.10 U1.11 | length 8.1
  Top Layer w0.254: J_NANO_1.10 2.263,16.106 2.263,17.041 U1.11
NetJ_NANO_1_11: J_NANO_1.11 U1.12 | length 10.3
  Top Layer w0.254: J_NANO_1.11 2.231,13.534 2.231,14.501 3.144,15.414 3.144,16.791 U1.12
NetJ_NANO_1_12: J_NANO_1.12 U1.13 | length 12.5
  Top Layer w0.254: J_NANO_1.12 3.683,12.446 3.683,16.198 U1.13
NetJ_NANO_1_13: J_NANO_1.13 U1.14 | length 14.7
  Top Layer w0.254: J_NANO_1.13 4.191,10.414 4.191,15.575 U1.14
NetJ_NANO_2_4: J_NANO_2.4 U1.28 | length 8.4
  Top Layer w0.254: U1.28 15.298,27.813 16.764,27.813 18.288,29.337 18.288,30.988 18.542,31.242 19.558,31.242 J_NANO_2.4
NetJ_NANO_2_6: J_NANO_2.6 U1.27 | length 5.9
  Top Layer w0.254: U1.27 14.81,26.16 15.956,27.305 18.415,27.305 J_NANO_2.6
NetJ_NANO_2_7: J_NANO_2.7 U1.26 | length 7.6
  Top Layer w0.254: U1.26 16.417,26.67 17.907,26.67 18.288,26.289 18.288,23.749 18.519,23.518 19.662,23.518 J_NANO_2.7
NetJ_NANO_2_8: J_NANO_2.8 U1.25 | length 8
  Top Layer w0.254: U1.25 16.914,26.035 17.526,26.035 17.78,25.781 17.78,22.86 J_NANO_2.8
NetJ_NANO_2_9: J_NANO_2.9 U1.24 | length 7.3
  Top Layer w0.254: U1.24 15.907,22.97 17.022,21.855 v1(17.022,21.848)
  Bottom Layer w0.254: v1(17.022,21.848) 18.03,21.848 18.288,21.59 18.288,18.796 18.668,18.416 J_NANO_2.9 J_NANO_2.9
NetJ_NANO_2_10: J_NANO_2.10 U1.23 | length 8.4
  Top Layer w0.254: U1.23 15.43,22.412 18.288,19.554 18.288,17.272 J_NANO_2.10
NetJ_NANO_2_13: J_NANO_2.13 U1.19 | length 17.2
  Top Layer w0.254: U1.19 13.617,19.611 14.545,19.611 15.875,18.281 15.875,11.171 16.185,10.861 v1(16.185,10.732)
  Bottom Layer w0.254: v1(16.185,10.732) 16.185,8.453 16.51,8.128 19.558,8.128 J_NANO_2.13
NetPWR_2: PWR.2 R8.2 | length 2.5
  Top Layer w0.254: PWR.2 R8.2
NetR2_2: R2.2 U_USB.1 | length 13.5
  Bottom Layer w0.254: U_USB.1 14.614,17.339 13.631,17.339 13.335,17.636 13.335,19.431 13.548,19.644 14.526,19.644 14.984,20.102 14.984,27.384 15.201,27.6 15.201,27.633 15.586,28.018 R2.2
NetR3_2: R3.2 U_USB.5 | length 25.8
  Top Layer w0.254: v1(11.557,17.907) 10.944,17.907 10.795,17.758 10.795,14.605 11.176,14.224 v1(13.085,14.224)
  Bottom Layer w0.254: v1(11.557,17.907) 11.557,19.812 11.843,20.098 14.338,20.098 14.53,20.29 14.53,20.887 14.53,25.094 13.724,25.9 13.724,29.586 15.586,31.447 R3.2 ; v1(13.085,14.224) 13.085,14.355 13.436,14.706 U_USB.5
NetR6_1: R6.1 RX.1 | length 2.4
  Top Layer w0.254: RX.1 R6.1
NetR6_2: R6.2 U_USB.23 | length 5.8
  Top Layer w0.254: R6.2 v1(9.779,16.256)
  Bottom Layer w0.254: U_USB.23 8.595,14.056 8.763,14.224 8.763,16.212 8.912,16.36 9.675,16.36 v1(9.779,16.256)
NetR7_1: R7.1 TX.1 | length 2.4
  Top Layer w0.254: TX.1 R7.1
NetR7_2: R7.2 U_USB.22 | length 8.5
  Top Layer w0.254: v1(11.811,16.256) 12.319,16.256 12.573,16.002 12.573,15.547 12.188,15.162 R7.2
  Bottom Layer w0.254: U_USB.22 7.221,13.43 10.128,13.43 11.811,15.113 v1(11.811,16.256)
PB5_SCK: J_NANO_2.15 P4.3 R1.1 U1.17 | length 74.9
  Top Layer w0.254: U1.17 12.446,18.519 12.446,17.526 14.066,15.906 14.066,15.447 R1.1 14.513,15.161 15.421,14.253 15.421,8.074 v1(15.494,8.001) ; v1(18.415,41.021) 20.574,41.021 20.955,40.64 20.955,3.429 20.702,3.176 J_NANO_2.15 J_NANO_2.15
  Bottom Layer w0.254: P4.3 11.897,36.744 13.791,36.744 15.655,38.608 17.018,38.608 17.526,39.116 17.526,40.259 18.288,41.021 v1(18.415,41.021) ; v1(15.494,8.001) 16.352,7.143 20.543,7.143 20.955,6.731 20.955,3.683 20.636,3.364 19.874,3.364 J_NANO_2.15
PB6: U1.7 X1.3 | length 10
  Top Layer w0.254: U1.7 7.428,24.669 11.526,24.669 12.065,24.13 v1(12.065,21.963)
  Bottom Layer w0.254: v1(12.065,21.963) 13.003,21.025 X1.3
PB7: U1.8 X1.1 | length 4
  Top Layer w0.254: U1.8 7.146,23.819 7.643,23.819 v1(7.747,23.715)
  Bottom Layer w0.254: v1(7.747,23.715) 9.013,23.715 X1.1
PD0_RXD: J_NANO_1.1 R2.1 U1.30 | length 22.5
  Top Layer w0.254: J_NANO_1.1 3.713,38.735 4.064,38.384 4.064,35.56 6.477,33.147 12.065,33.147 12.399,32.813 12.399,31.485 14.348,29.535 14.348,29.086 v2(14.351,29.083) 14.328,29.083 13.102,27.857 U1.30
  Bottom Layer w0.254: v2(14.351,29.083) 14.833,29.565 15.419,29.565 R2.1
PD1_TXD: J_NANO_1.2 R3.1 U1.31 | length 38.5
  Top Layer w0.254: v1(12.446,30.369) 12.55,30.265 12.788,30.265 13.462,29.591 13.462,29.371 U1.31 ; v1(16.995,41.044) 16.995,40.749 17.018,40.726 v1(17.018,34.544)
  Bottom Layer w0.254: J_NANO_1.2 1.78,36.447 1.187,36.447 0.92,36.714 0.92,40.29 2.295,41.665 13.614,41.665 14.236,41.044 v1(16.995,41.044) ; v1(12.446,30.369) 12.446,31.75 12.7,32.004 14.478,32.004 15.201,32.727 15.201,32.937 15.586,33.322 15.91,33.322 17.018,34.431 v1(17.018,34.544)
RESET: J_NANO_2.3 J_NANO_2.5 P4.5 R5.1 SW1.2 U1.29 | length 28.4
  Top Layer w0.254: P4.5 13.335,34.179 SW1.2 13.335,34.011 13.335,33.677 13.484,33.528 v1(14.473,33.528) ; U1.29 15.281,28.928 R5.1 16.665,28.984 v2(17.526,29.845) v2@17.48,29.891
  Bottom Layer w0.254: v1(14.473,33.528) 14.473,34.92 14.859,35.306 18.119,35.306 19.685,33.74 J_NANO_2.3 20.828,33.655 21.209,33.274 21.209,28.829 20.955,28.575 J_NANO_2.5 18.415,29.845 v2(17.526,29.845)
VIN: J_NANO_2.1 U2.3 | length 9.9
  Bottom Layer w0.254: U2.3 13.591,34.561 13.591,35.901 14.647,36.957 17.78,36.957 18.161,37.338 18.161,38.608 18.542,38.989 19.431,38.989 J_NANO_2.1
VUSB: C2.1 C9.1 D1.2 F1.2 | length 19.5
  Top Layer w0.3: F1.2 5.61,3.871 15.418,3.871 16.112,4.564 16.211,4.564 C2.1 16.815,5.117 17.368,5.67 17.368,5.721 17.897,6.25 17.897,9.56 17.655,9.802 17.455,10.002 17.372,10.002 C9.1
  Top Layer w0.381: D1.2 17.272,11.577 C9.1
pads on no net: J3.4 R4.2 SW1.1 SW1.4 U_USB.3 U_USB.6 U_USB.8 U_USB.9 U_USB.10 U_USB.11 U_USB.12 U_USB.13 U_USB.14 U_USB.19 U_USB.24 U_USB.27 U_USB.28

## Polygon pours and split planes (outlines as drawn)
GND on Bottom Layer "GND_L04_P001" (solid, pour order 1): 0,42.164 21.717,42.164 21.717,0 0,0
GND on Top Layer "GND_L01_P000" (solid, pour order 0): 0,42.164 21.717,42.164 21.717,0 0,0
GND on Layer 2 (split plane): 21.207,0.51 0.51,0.51 0.51,41.654 21.207,41.654
GND on GND (split plane): 21.207,0.51 0.51,0.51 0.51,41.654 21.207,41.654

## Silkscreen, mask and mechanical layers (free items; w line width, h text height)
Top Overlay:
  text "RX" at 1.721,39.948 h0.3
  text "VIN" at 19.247,39.948 h0.3
  text "GND" at 18.485,37.281 h0.3
  text "TX" at 2.483,37.154 h0.3
  text "RESET" at 18.231,34.741 h0.3
  text "32" at 2.61,34.614 h0.3
  text "5V" at 2.61,32.074 h0.3
  text "28" at 18.612,32.074 h0.3
  text "GND" at 2.483,29.661 h0.3
  text "RESET" at 18.231,29.661 h0.3
  text "1" at 2.737,26.867 h0.3
  text "27" at 18.612,26.867 h0.3
  text "26" at 18.612,24.454 h0.3
  text "2" at 2.737,24.327 h0.3
  text "25" at 18.612,21.914 h0.3
  text "9" at 2.737,21.787 h0.3
  text "10" at 2.61,19.374 h0.3
  text "24" at 18.612,19.374 h0.3
  text "11" at 2.61,16.834 h0.3
  text "23" at 18.612,16.834 h0.3
  text "12" at 2.61,14.294 h0.3
  text "21" at 18.612,14.294 h0.3
  text "13" at 2.61,11.754 h0.3
  text "20" at 18.612,11.754 h0.3
  text "14" at 2.61,9.214 h0.3
  text "19" at 18.612,9.214 h0.3
  text "3V3" at 18.358,6.801 h0.3
  text "MOSI" at 2.61,6.674 h0.3
  text "SCK" at 18.358,4.261 h0.3
  text "MISO" at 2.61,4.134 h0.3
Mechanical 1:
  the board outline again, w0.254